# EAGLE board PROJECT-TSC_v115 (EAGLE 9.7.0)
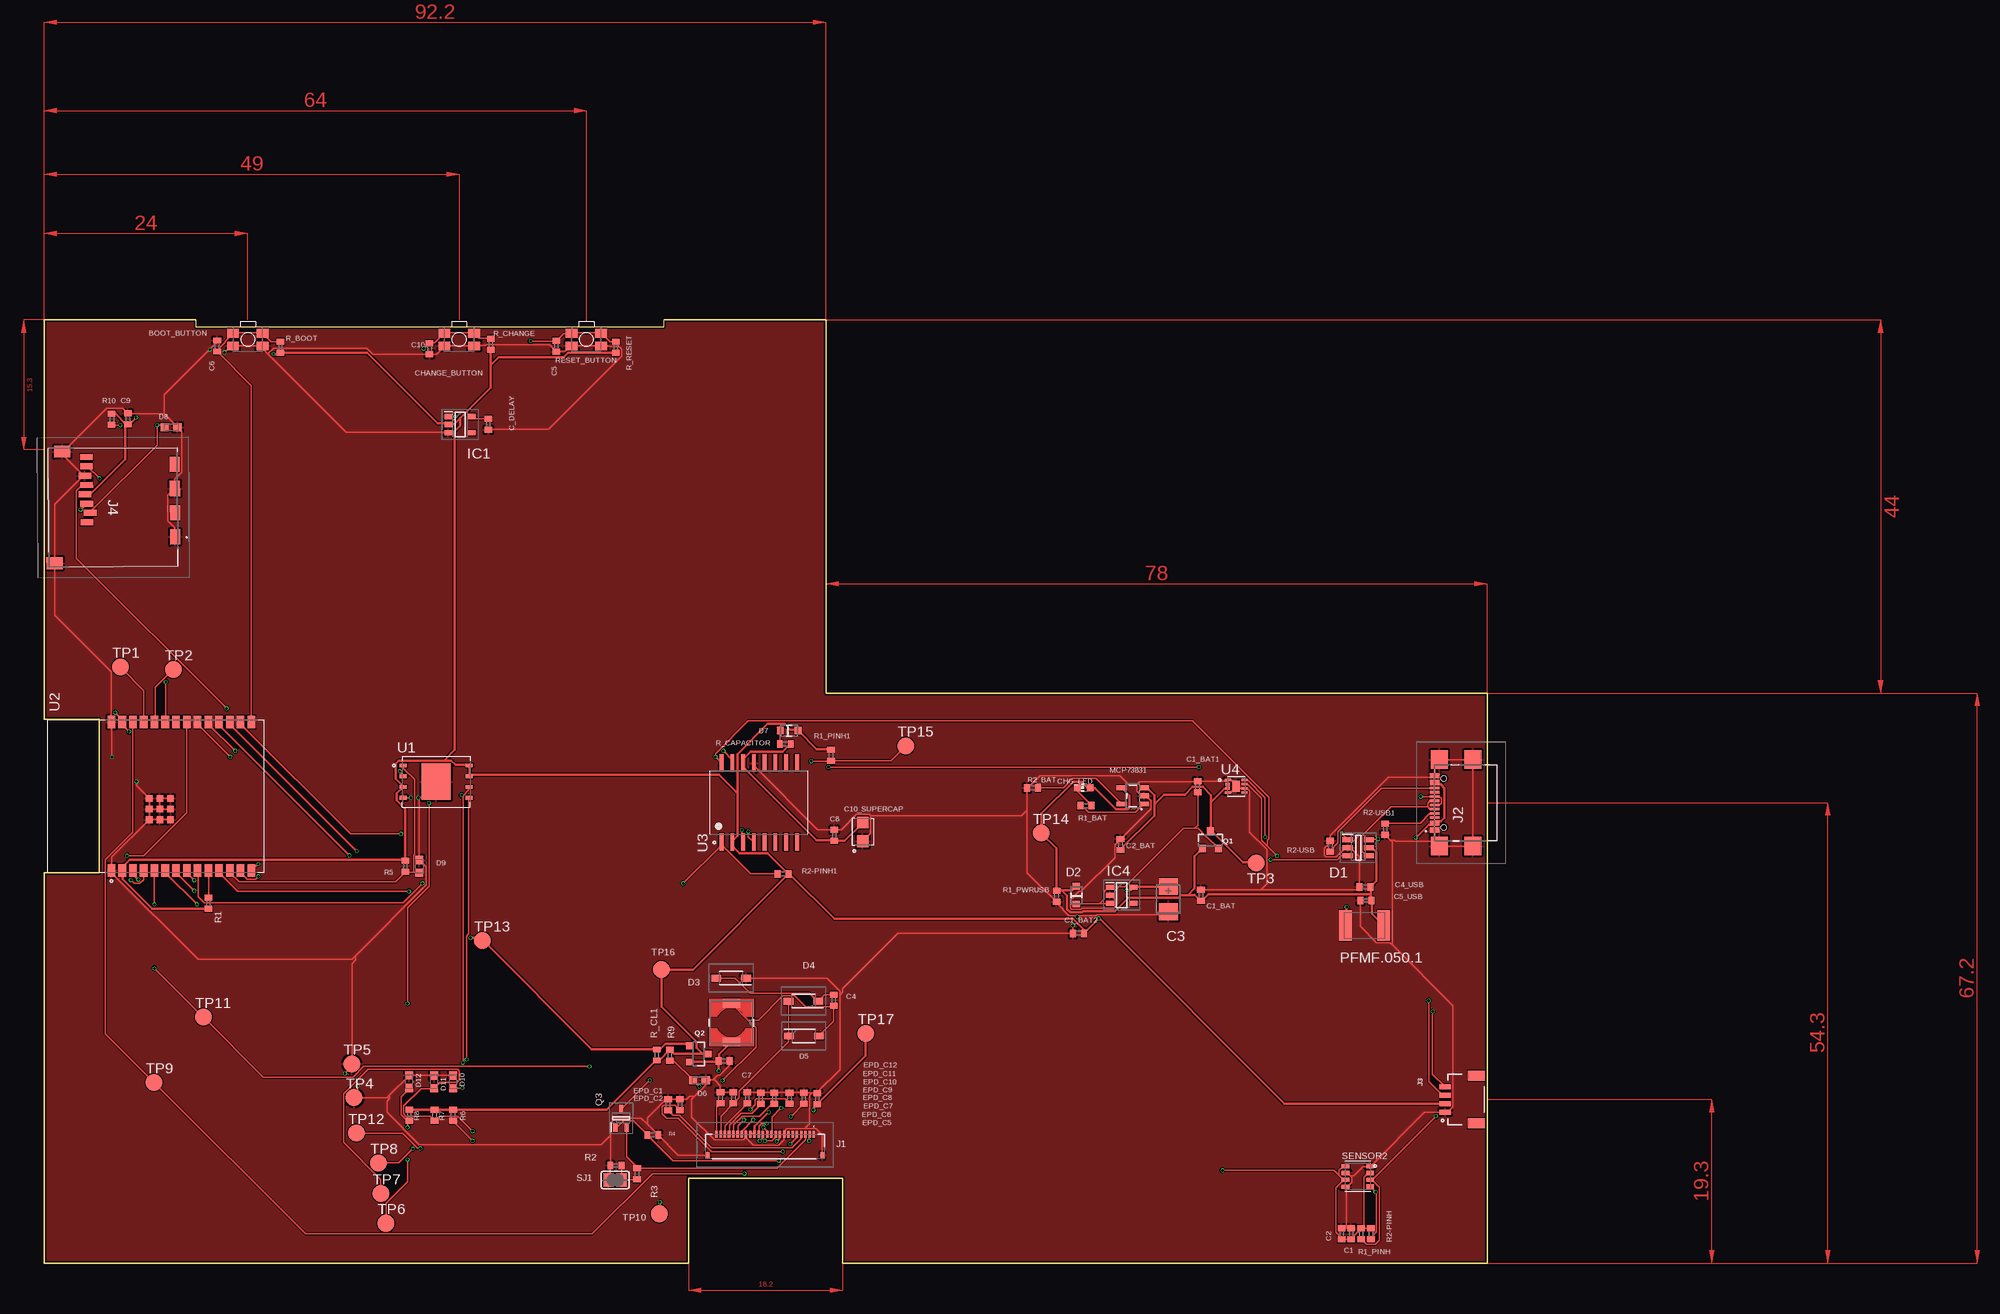
[diagram p0: board, top side]
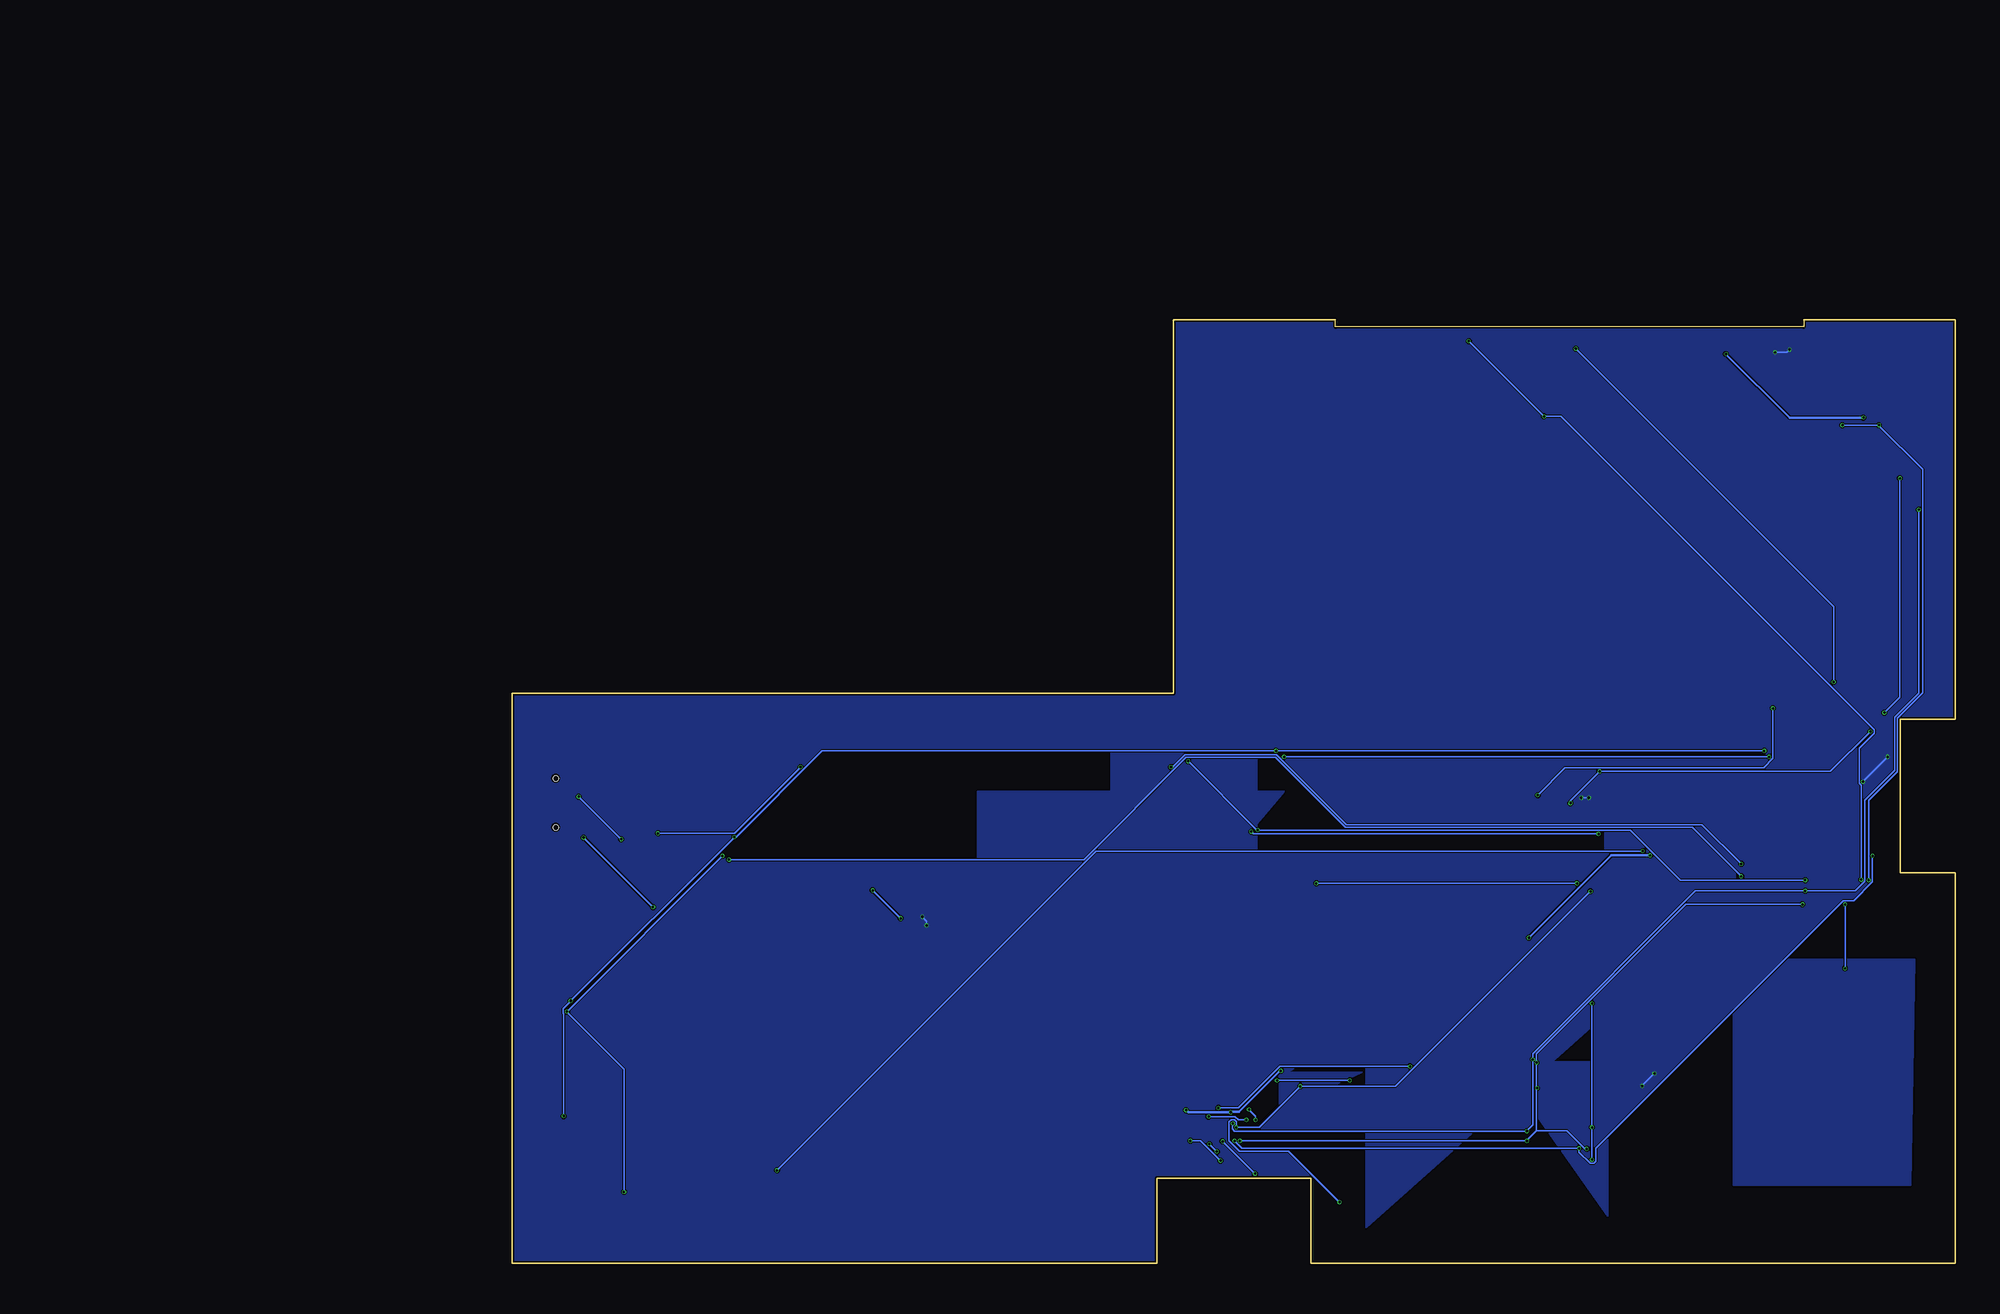
[diagram p1: board, bottom side, seen from below]

Size 170.2 x 111.2 mm. Coordinates in mm from the lower left corner, seen from the top.
Outline: 0,111.2 17.9,111.2 17.9,110.4 73.1,110.4 73.1,111.2 92.2,111.2 92.2,67.2 170.2,67.2 170.2,0 94.2,0 94.2,10 76,10 76,0 0,0 0,46 6.5,46 6.5,64.1 0,64.1 0,111.2
Copper layers (1*16): Top 0.035mm / dielectric 1.6mm / Bottom 0.035mm
Design rules "jlcpcb-2layers.dru": minimum track width 5mil, minimum drill 0.3mm, track to track 5mil, track to pad 5mil, pad to pad 5mil, via to via 5mil, smd to smd 5mil, copper to edge 0.2mm, drill to drill 6mil, minimum pad ring 10mil, minimum via ring 3mil, stop-mask expansion 4mil, vias tented up to drill 0mil, thermal gap 10mil
Net classes: 1 power: width 0.3 mm; 2 normal: width 0.15 mm

## Footprints (pad centres in the part's own frame; a part is rotated, then mirrored left to right if it is on the bottom)
MYBUTTON = smd 1.4 x 1.05: 1 1.75,0.75; 2 -1.75,0.75; 3 -1.75,-0.75; 4 1.75,-0.75
EAGLE-LTSPICE_C0402 = smd 0.7 x 0.9: 1 -0.65,0; 2 0.65,0
RCL_CT3528 = smd 2 x 2.2: + -1.5,0; - 1.5,0
CAPCP3225X100N = smd 1.4 x 1.4: 1 -1.1,0; 2 1.1,0
ADAFRUIT_CHIP-LED0603 = smd 0.8 x 0.8: A 0,-0.75; C 0,0.75
SOT95P280X145-6N = smd 1.2 x 0.6: 1 -1.25,0.95; 2 -1.25,0; 3 -1.25,-0.95; 4 1.25,-0.95; 5 1.25,0; 6 1.25,0.95
ESP32_WROVER_AVX---SD0805S020S1R0_AVX_SD0805S020S1R0_0 = smd 0.8 x 0.9: 1 -1.05,0; 2 1.05,0
SOD3716X135N = smd 1.15 x 0.8: 1 -1.75,0; 2 1.75,0
DIOC1608X36N = smd 0.97 x 0.94: 1 -0.75,0; 2 0.75,0
SOT95P280X120-5N = smd 0.9 x 0.6: 1 -1.4,0.95; 2 -1.4,0; 3 -1.4,-0.95; 4 1.4,-0.95; 5 1.4,0.95
FH34SRJ24S05SH99 = smd 0.3 x 0.8: 1 5.75,1.45; 2 5.25,1.45; 3 4.75,1.45; 4 4.25,1.45; 5 3.75,1.45; 6 3.25,1.45; 7 2.75,1.45; 8 2.25,1.45; 9 1.75,1.45; 10 1.25,1.45; 11 0.75,1.45; 12 0.25,1.45; 13 -0.25,1.45; 14 -0.75,1.45; 15 -1.25,1.45; 16 -1.75,1.45; 17 -2.25,1.45; 18 -2.75,1.45; 19 -3.25,1.45; 20 -3.75,1.45; 21 -4.25,1.45; 22 -4.75,1.45; 23 -5.25,1.45; 24 -5.75,1.45 | smd 0.4 x 0.8: MP1 6.75,-1.05; MP2 -6.75,-1.05
SAMACSYS_PARTS_USB4110GFA = smd 0.3 x 1.15: A1 -3.35,3.678; A4 -2.55,3.678; A5 -1.25,3.678; A6 -0.25,3.678; A7 0.25,3.678; A8 1.25,3.678; A9 2.55,3.678; A12 3.35,3.678; B1 3.05,3.678; B4 2.25,3.678; B5 1.75,3.678; B6 0.75,3.678; B7 -0.75,3.678; B8 -1.75,3.678; B9 -2.25,3.678; B12 -3.05,3.678 | smd 2.18 x 2: MP1 -5.11,-0.827; MP2 5.11,-0.827; MP3 -5.11,3.103; MP4 5.11,3.103 | hole 0.65: -2.89,2.603; 2.89,2.603
JST04_1MM_RA = smd 0.6 x 1.35: 1 -1.5,0; 2 -0.5,0; 3 0.5,0; 4 1.5,0 | smd 1.2 x 2: NC1 2.8,-3.675; NC2 -2.8,-3.675
112ATAARR03ATTEND = smd 1.8 x 1.2: G1 10.6,10.4; G2 4.9,10.4; S1 7.75,10.4; S2 2.05,10.4 | smd 1.4 x 1.9: G3 13.6,-3.85; G4 0.45,-2.85 | smd 0.7 x 1.5: P1 8.8,0; P2 7.7,0.4; P3 6.6,0; P4 5.5,-0.2; P5 4.4,0; P6 3.3,-0.2; P7 2.2,0; P8 1.1,0
IND_4828-WE-TPC_WRE = smd 1.016 x 2.032: 1 -2.286,0; 2 2.286,0
ESP32_WROVER_SPARKFUN-IC-POWER_SOT23-5 = smd 0.55 x 1.2: 1 -0.95,-1.3; 2 0,-1.3; 3 0.95,-1.3; 4 0.95,1.3; 5 -0.95,1.3
ESP32C6_VARISTOR_CT/CN1812 = smd 1.5 x 3.6: 1 -2.25,0; 2 2.25,0
ESP32_WROVER_SPARKFUN-DISCRETESEMI_SOT23-3 = smd 0.8 x 0.9: 1 -0.95,-1; 2 0.95,-1; 3 0,1.1
SOT65P210X110-3N = smd 1.05 x 0.5: 1 -1.05,0.65; 2 -1.05,-0.65; 3 1.05,0
ESP32_WROVER_EAGLE-LTSPICE_R0402 = smd 0.7 x 0.9: 1 -0.65,0; 2 0.65,0
ESP32_WROVER_BME680_PSON80P300X300X100-8N = smd 1.016 x 0.5: 1 1.458,1.2; 2 1.458,0.4; 3 1.458,-0.4; 4 1.458,-1.2; 5 -1.458,-1.22; 6 -1.458,-0.4; 7 -1.458,0.4; 8 -1.458,1.2
SJ = smd 1.168 x 1.6: 1 -0.762,0; 2 0.762,0
TP20R = smd 2 x 2: TP 0,0
SON127P600X800X80-9N = smd 0.94 x 0.44: 1 -3.895,1.905; 2 -3.895,0.635; 3 -3.895,-0.635; 4 -3.895,-1.905; 5 3.895,-1.905; 6 3.895,-0.635; 7 3.895,0.635; 8 3.895,1.905 | smd 3.4 x 4.3: 9 0,0
XCVR_ESP32-C6-WROOM-1-N8 = smd 1.5 x 0.9: 1 -8.75,5.26; 2 -8.75,3.99; 3 -8.75,2.72; 4 -8.75,1.45; 5 -8.75,0.18; 6 -8.75,-1.09; 7 -8.75,-2.36; 8 -8.75,-3.63; 9 -8.75,-4.9; 10 -8.75,-6.17; 11 -8.75,-7.44; 12 -8.75,-8.71; 13 -8.75,-9.98; 14 -8.75,-11.25; 15 8.75,-11.25; 16 8.75,-9.98; 17 8.75,-8.71; 18 8.75,-7.44; 19 8.75,-6.17; 20 8.75,-4.9; 21 8.75,-3.63; 22 8.75,-2.36; 23 8.75,-1.09; 24 8.75,0.18; 25 8.75,1.45; 26 8.75,2.72; 27 8.75,3.99; 28 8.75,5.26 | smd 0.8 x 0.8: 29_1 -2.755,0.79; 29_2 -1.505,0.79; 29_3 -0.255,0.79; 29_4 -2.755,-0.46; 29_5 -1.505,-0.46; 29_6 -0.255,-0.46; 29_7 -2.755,-1.71; 29_8 -1.505,-1.71; 29_9 -0.255,-1.71
SOIC127P1032X265-16N = smd 2.05 x 0.59: 1 -4.655,4.445; 2 -4.655,3.175; 3 -4.655,1.905; 4 -4.655,0.635; 5 -4.655,-0.635; 6 -4.655,-1.905; 7 -4.655,-3.175; 8 -4.655,-4.445; 9 4.655,-4.445; 10 4.655,-3.175; 11 4.655,-1.905; 12 4.655,-0.635; 13 4.655,0.635; 14 4.655,1.905; 15 4.655,3.175; 16 4.655,4.445
SON50P200X200X80-9N = smd 0.76 x 0.27: 1 -0.985,0.75; 4 -0.985,-0.75; 5 0.985,-0.75; 6 0.985,-0.25; 7 0.985,0.25; 8 0.985,0.75 | smd 0.61 x 0.305: 2 -0.985,0.25; 3 -0.985,-0.25 | smd 0.9 x 1.3: 9 0,0

## Placement (x,y rotation side)
BOOT_BUTTON  BUTTON_CUSYOMV1  [MYBUTTON]  24.03,108.89 180 top
C1  100nF  [EAGLE-LTSPICE_C0402]  154.16,3.43 90 top
C1_BAT  4.7uF  [EAGLE-LTSPICE_C0402]  136.45,43.35 90 top
C1_BAT1  4.7uF  [EAGLE-LTSPICE_C0402]  136.05,56.14 90 top
C1_BAT2  4.7uF  [EAGLE-LTSPICE_C0402]  121.99,38.87 180 top
C2  100nF  [EAGLE-LTSPICE_C0402]  153.04,3.43 90 top
C2_BAT  4.7uF  [EAGLE-LTSPICE_C0402]  126.96,49.35 90 top
C3  100uF TANT  [RCL_CT3528]  132.61,42.9 270 top
C4  4.7uF/25V  [EAGLE-LTSPICE_C0402]  93.15,30.99 270 top
C4_USB  100nF  [EAGLE-LTSPICE_C0402]  155.8,44.35 180 top
C5  1uF  [EAGLE-LTSPICE_C0402]  60.42,108.11 270 top
C5_USB  4.7uF  [EAGLE-LTSPICE_C0402]  155.88,42.75 180 top
C6  100nF  [EAGLE-LTSPICE_C0402]  20.42,108.13 90 top
C7  10uF  [EAGLE-LTSPICE_C0402]  80.22,23.81 0 top
C8  100nF  [EAGLE-LTSPICE_C0402]  93.2,50.43 91.1 top
C9  100nF  [EAGLE-LTSPICE_C0402]  9.88,99.53 90 top
C10  100nF  [EAGLE-LTSPICE_C0402]  45.46,107.83 270 top
C10_SUPERCAP  CPH3225A  [CAPCP3225X100N]  96.56,50.84 90 top
C_DELAY  100nF  [EAGLE-LTSPICE_C0402]  52.41,98.89 270 top
CHANGE_BUTTON  BUTTON_CUSYOMV1  [MYBUTTON]  48.96,108.89 180 top
CHG_LED  [ADAFRUIT_CHIP-LED0603]  122.64,56.05 90 top
D1  USBLC6-2SC6Y  [SOT95P280X145-6N]  155,48.97 0 top
D2  ESP32_WROVER_AVX---SD0805S020S1R0_AVX_SD0805S020S1R0_0_0AVX_SD0805S020S1R0_0_0  [ESP32_WROVER_AVX---SD0805S020S1R0_AVX_SD0805S020S1R0_0]  121.74,43.38 90 top
D3  MBR0530  [SOD3716X135N]  81.03,33.59 180 top
D4  MBR0530  [SOD3716X135N]  89.57,30.88 180 top
D5  MBR0530  [SOD3716X135N]  89.61,26.78 0 top
D6  PGB1010603MR  [DIOC1608X36N]  77.3,21.57 0 top
D7  ESP32_WROVER_AVX---SD0805S020S1R0_AVX_SD0805S020S1R0_0_0AVX_SD0805S020S1R0_0_0  [ESP32_WROVER_AVX---SD0805S020S1R0_AVX_SD0805S020S1R0_0]  87.89,62.78 0 top
D8  PGB1010603MR  [DIOC1608X36N]  14.98,98.57 0 top
D9  PGB1010603MR  [DIOC1608X36N]  44.26,46.77 90 top
D10  PGB1010603MR  [DIOC1608X36N]  48.24,21.37 90 top
D11  PGB1010603MR  [DIOC1608X36N]  46.02,21.37 90 top
D12  PGB1010603MR  [DIOC1608X36N]  43.07,21.38 90 top
EPD_C1  1uF/50V  [EAGLE-LTSPICE_C0402]  73.59,18.65 90 top
EPD_C2  1uF/50V  [EAGLE-LTSPICE_C0402]  75,18.65 90 top
EPD_C5  0.1uF/50V  [EAGLE-LTSPICE_C0402]  91.19,19.39 90 top
EPD_C6  1uF/50V  [EAGLE-LTSPICE_C0402]  89.61,19.45 90 top
EPD_C7  1uF/50V  [EAGLE-LTSPICE_C0402]  87.92,19.45 90 top
EPD_C8  1uF/50V  [EAGLE-LTSPICE_C0402]  86.13,19.45 90 top
EPD_C9  1uF/50V  [EAGLE-LTSPICE_C0402]  84.54,19.45 90 top
EPD_C10  1uF/50V  [EAGLE-LTSPICE_C0402]  82.95,19.49 90 top
EPD_C11  1uF/50V  [EAGLE-LTSPICE_C0402]  81.31,19.47 90 top
EPD_C12  1uF/50V  [EAGLE-LTSPICE_C0402]  79.79,19.49 90 top
IC1  BD5229G-TR  [SOT95P280X120-5N]  49.07,98.87 0 top
IC4  XC6220A331MR-G  [SOT95P280X120-5N]  127.11,43.37 0 top
J1  FH34SRJ-24S-0.5SH_99_  [FH34SRJ24S05SH99]  85.04,13.74 0 top
J2  SAMACSYS_PARTS_USB4110-GF-A  [SAMACSYS_PARTS_USB4110GFA]  167.68,54.26 90 top
J3  QWIIC_RIGHT_ANGLE  [JST04_1MM_RA]  165.25,19.28 90 top
J4  112A-TAAR-R03_ATTEND  [112ATAARR03ATTEND]  4.99,96.15 270.4 top
L1  68uH  [IND_4828-WE-TPC_WRE]  81.07,28.35 270 top
MCP73831  ESP32_WROVER_SPARKFUN-IC-POWER_MCP73831  [ESP32_WROVER_SPARKFUN-IC-POWER_SOT23-5]  128.41,55.09 90 top
PFMF.050.1  ESP32C6_VARISTORCN1812  [ESP32C6_VARISTOR_CT/CN1812]  155.74,39.8 0 top
Q1  20V/4.2A/52mΩ/1.4W  [ESP32_WROVER_SPARKFUN-DISCRETESEMI_SOT23-3]  137.56,49.86 0 top
Q2  20V/4.2A/52mΩ/1.4W  [ESP32_WROVER_SPARKFUN-DISCRETESEMI_SOT23-3]  77.18,24.66 270 top
Q3  SI1308EDL-T1-GE3  [SOT65P210X110-3N]  68.04,17.08 90 top
R1  10K  [ESP32_WROVER_EAGLE-LTSPICE_R0402]  19.38,42.41 90 top
R1_BAT  200  [ESP32_WROVER_EAGLE-LTSPICE_R0402]  122.88,53.93 0 top
R1_PINH  10K  [ESP32_WROVER_EAGLE-LTSPICE_R0402]  155.33,3.47 90 top
R1_PINH1  10K  [ESP32_WROVER_EAGLE-LTSPICE_R0402]  92.81,59.89 90 top
R1_PWRUSB  100K  [ESP32_WROVER_EAGLE-LTSPICE_R0402]  119.42,43.24 90 top
R2  2.2  [ESP32_WROVER_EAGLE-LTSPICE_R0402]  67.44,11.51 0 top
R2-PINH  10K  [ESP32_WROVER_EAGLE-LTSPICE_R0402]  156.49,3.47 90 top
R2-PINH1  10K  [ESP32_WROVER_EAGLE-LTSPICE_R0402]  87.17,45.89 0 top
R2-USB  5k1  [ESP32_WROVER_EAGLE-LTSPICE_R0402]  151.7,49.13 90 top
R2-USB1  5K1  [ESP32_WROVER_EAGLE-LTSPICE_R0402]  158.17,51.17 90 top
R2_BAT  2K  [ESP32_WROVER_EAGLE-LTSPICE_R0402]  116.59,56.03 0 top
R3  0.47  [ESP32_WROVER_EAGLE-LTSPICE_R0402]  69.94,10.51 270 top
R4  10K  [ESP32_WROVER_EAGLE-LTSPICE_R0402]  71.8,15.11 0 top
R5  10K  [ESP32_WROVER_EAGLE-LTSPICE_R0402]  42.62,46.81 90 top
R6  10K  [ESP32_WROVER_EAGLE-LTSPICE_R0402]  48.24,17.41 90 top
R7  10K  [ESP32_WROVER_EAGLE-LTSPICE_R0402]  46.06,17.41 90 top
R8  10K  [ESP32_WROVER_EAGLE-LTSPICE_R0402]  43.08,17.41 90 top
R9  10K  [ESP32_WROVER_EAGLE-LTSPICE_R0402]  73.8,24.51 90 top
R10  10K  [ESP32_WROVER_EAGLE-LTSPICE_R0402]  7.96,99.51 90 top
R_BOOT  10K  [ESP32_WROVER_EAGLE-LTSPICE_R0402]  27.88,107.97 90 top
R_CAPACITOR  15  [ESP32_WROVER_EAGLE-LTSPICE_R0402]  87.42,61.18 0 top
R_CHANGE  10K  [ESP32_WROVER_EAGLE-LTSPICE_R0402]  52.69,108.34 90 top
R_CL1  10K  [ESP32_WROVER_EAGLE-LTSPICE_R0402]  72.28,24.53 90 top
R_RESET  10K  [ESP32_WROVER_EAGLE-LTSPICE_R0402]  67.43,107.99 90 top
RESET_BUTTON  BUTTON_CUSYOMV1  [MYBUTTON]  63.95,108.89 180 top
SENSOR2  ESP32_WROVER_BME680_BME680  [ESP32_WROVER_BME680_PSON80P300X300X100-8N]  154.94,10.22 0 top
SJ1  [SJ]  67.36,9.79 0 top
TP1  TPTP20R  [TP20R]  9.01,70.29 0 top
TP2  TPTP20R  [TP20R]  15.23,69.99 0 top
TP3  TPTP20R  [TP20R]  142.95,47.19 0 top
TP4  TPTP20R  [TP20R]  36.57,19.49 0 top
TP5  TPTP20R  [TP20R]  36.29,23.49 0 top
TP6  TPTP20R  [TP20R]  40.31,4.69 0 top
TP7  TPTP20R  [TP20R]  39.73,8.19 0 top
TP8  TPTP20R  [TP20R]  39.45,11.79 0 top
TP9  TPTP20R  [TP20R]  12.97,21.29 0 top
TP10  TPTP20R  [TP20R]  72.59,5.81 0 top
TP11  TPTP20R  [TP20R]  18.79,28.99 0 top
TP12  TPTP20R  [TP20R]  36.84,15.31 0 top
TP13  TPTP20R  [TP20R]  51.69,38.01 0 top
TP14  TPTP20R  [TP20R]  117.59,50.69 0 top
TP15  TPTP20R  [TP20R]  101.64,60.99 0 top
TP16  TPTP20R  [TP20R]  72.79,34.59 0 top
TP17  TPTP20R  [TP20R]  96.94,27.09 0 top
U1  W25Q512JVEIQ  [SON127P600X800X80-9N]  46.24,56.76 0 top
U2  ESP32-C6-WROOM-1-N8  [XCVR_ESP32-C6-WROOM-1-N8]  13.2,55.04 90 top
U3  DS3231SN#  [SOIC127P1032X265-16N]  84.35,54.3 90 top
U4  MAX17048G+T10  [SON50P200X200X80-9N]  140.6,56.22 0 top

## Library data of the parts
BOOT_BUTTON CHANGE_BUTTON CHG_LED PFMF.050.1 RESET_BUTTON SJ1 TP1-TP17 = DeskAssistant v19 v1
C1 C1_BAT C1_BAT1 C1_BAT2 C2 C2_BAT C4 C4_USB C5 C5_USB C6-C10 C_DELAY EPD_C1 EPD_C2 EPD_C5-EPD_C12 = DeskAssistant v19 v1; SPICEMODEL: NONE; SPICEPREFIX: C
C3 = DeskAssistant v19 v1; SPICEPREFIX: C
C10_SUPERCAP = DeskAssistant v19 v1; AVAILABILITY: Not in stock; CHECK_PRICES: https://www.snapeda.com/parts/CPH3225A/Seiko+Instruments/view-part/?ref=eda; DESCRIPTION: 11 mF (EDLC) Supercapacitor 3.3 V 1210 (3225 Metric) - -; MF: Seiko Instruments; MP: CPH3225A; PACKAGE: 1210 Seiko; PRICE: None; PURCHASE-URL: https://www.snapeda.com/api/url_track_click_mouser/?unipart_id=562593&manufacturer=Seiko Instruments&part_name=CPH3225A&search_term=None; SNAPEDA_LINK: https://www.snapeda.com/parts/CPH3225A/Seiko+Instruments/view-part/?ref=snap
D1 = DeskAssistant v19 v1; AVAILABILITY: In Stock; CHECK_PRICES: https://www.snapeda.com/parts/USBLC6-2SC6Y/STMicroelectronics/view-part/?ref=eda; DESCRIPTION: 17V Clamp 5A (8/20µs) Ipp Tvs Diode Surface Mount SOT-23-6; MF: STMicroelectronics; MP: USBLC6-2SC6Y; PACKAGE: SOT-23-6 STMicroelectronics; PRICE: None; SNAPEDA_LINK: https://www.snapeda.com/parts/USBLC6-2SC6Y/STMicroelectronics/view-part/?ref=snap
D2 D7 = DeskAssistant v19 v1; CENTROID_NOT_SPECIFIED: No; DATASHEET: http://datasheets.avx.com/schottky.pdf; DIGIKEY_DESCRIPTION: DIODE SCHOTTKY 20V 1A 0805; DIGIKEY_PART_NUMBER: 478-7800-1-ND; LEAD_FREE: yes; MF: AVX; MOUSER_PART_NUMBER: 581-SD0805S020S1R0; PACKAGE: 0805 (2012 metric); PREFIX: D; ROHS: yes; TEMPERATURE_RANGE_HIGH: +125°C; TEMPERATURE_RANGE_LOW: -55°C
D3-D5 = DeskAssistant v19 v1; AVAILABILITY: In Stock; CHECK_PRICES: https://www.snapeda.com/parts/MBR0530/Onsemi/view-part/?ref=eda; DESCRIPTION: Diode Schottky 30 V 500mA Surface Mount SOD-123; MF: ON Semiconductor; MP: MBR0530; PACKAGE: SOD-123-2 ON Semiconductor; PRICE: None; PURCHASE-URL: https://www.snapeda.com/api/url_track_click_mouser/?unipart_id=179458&manufacturer=ON Semiconductor&part_name=MBR0530&search_term=None; SNAPEDA_LINK: https://www.snapeda.com/parts/MBR0530/Onsemi/view-part/?ref=snap
D6 D8-D12 = DeskAssistant v19 v1; AVAILABILITY: In Stock; CHECK_PRICES: https://www.snapeda.com/parts/PGB1010603MR/Littelfuse/view-part/?ref=eda; DESCRIPTION: 150V (Typ) Clamp - Ipp Tvs Diode Surface Mount 0603 (1608 Metric); MF: Littelfuse Inc.; MP: PGB1010603MR; PACKAGE: 0603 Littelfuse Inc.; PRICE: None; PURCHASE-URL: https://www.snapeda.com/api/url_track_click_mouser/?unipart_id=5659453&manufacturer=Littelfuse Inc.&part_name=PGB1010603MR&search_term=None; SNAPEDA_LINK: https://www.snapeda.com/parts/PGB1010603MR/Littelfuse/view-part/?ref=snap
IC1 = DeskAssistant v19 v1; DESCRIPTION: Voltage Detector with Adjustable Delay Time: CMOS processes are utilized to develop high precision, low current consumption CMOS reset ICs that allow arbitrary setting of the delay time. The extensive lineup includes both Nch Open Drain and CMOS output types in a wide range of detection voltages (from 2.3V to 6.0V, in 0.1V steps), enabling selection of the ideal solution based on customer requirements. In addition, the entire series is of course both lead-free and RoHS-compliant.; HEIGHT: 1.25mm; MANUFACTURER_NAME: ROHM Semiconductor; MANUFACTURER_PART_NUMBER: BD5229G-TR; MOUSER_PART_NUMBER: 755-BD5229G-TR; MOUSER_PRICE-STOCK: https://www.mouser.co.uk/ProductDetail/ROHM-Semiconductor/BD5229G-TR?qs=4kLU8WoGk0vvnhrrYwdszw%3D%3D
IC4 = DeskAssistant v19 v1; DESCRIPTION: LDO Voltage Regulators; HEIGHT: 1.2mm; MANUFACTURER_NAME: Torex; MANUFACTURER_PART_NUMBER: XC6220A331MR-G; MOUSER_PART_NUMBER: 865-XC6220A331MR-G; MOUSER_PRICE-STOCK: https://www.mouser.co.uk/ProductDetail/Torex-Semiconductor/XC6220A331MR-G?qs=AsjdqWjXhJ8ZSWznL1J0gg%3D%3D
J1 = DeskAssistant v19 v1; DESCRIPTION: 24 Position FFC, FPC Connector Contacts, Top and Bottom 0.020" (0.50mm) Surface Mount, Right Angle; HEIGHT: 1.1mm; MANUFACTURER_NAME: Hirose; MANUFACTURER_PART_NUMBER: FH34SRJ-24S-0.5SH(99); MOUSER_PART_NUMBER: 798-FH34SRJ24S05SH99; MOUSER_PRICE-STOCK: https://www.mouser.co.uk/ProductDetail/Hirose-Connector/FH34SRJ-24S-0.5SH99?qs=vcbW%252B4%252BSTIpKBl5ap9J8Fw%3D%3D
J2 = DeskAssistant v19 v1; DESCRIPTION: CONN USB 2.0 TYPE-C R/A SMT; HEIGHT: 3.26mm; MANUFACTURER_NAME: GCT (GLOBAL CONNECTOR TECHNOLOGY); MANUFACTURER_PART_NUMBER: USB4110-GF-A; MOUSER_PART_NUMBER: 640-USB4110-GF-A; MOUSER_PRICE-STOCK: https://www.mouser.co.uk/ProductDetail/GCT/USB4110-GF-A?qs=KUoIvG%2F9IlYiZvIXQjyJeA%3D%3D
J3 = DeskAssistant v19 v1; PROD_ID: CONN-13694
J4 = DeskAssistant v19 v1; DESCRIPTION: Micro SD Card Socket, Push-Push Type, Top Mount, SMT, H=1.83mm, 10u; HEIGHT: 1.9mm; MANUFACTURER_NAME: ATTEND; MANUFACTURER_PART_NUMBER: 112A-TAAR-R03 ATTEND
L1 = DeskAssistant v19 v1; COPYRIGHT: Copyright (C) 2024 Ultra Librarian. All rights reserved.; MANUFACTURER_PART_NUMBER: 744043680; MFR_NAME: Wurth Electronics
MCP73831 = DeskAssistant v19 v1; PROD_ID: IC-09995
Q1 Q2 = DeskAssistant v19 v1; PROD_ID: TRAN-14388
Q3 = DeskAssistant v19 v1; AVAILABILITY: In Stock; CHECK_PRICES: https://www.snapeda.com/parts/SI1308EDL-T1-GE3/Vishay+Siliconix/view-part/?ref=eda; DESCRIPTION: Si1308EDL-T1-GE3 N-channel MOSFET Transistor, 1.5 A, 30 V, 3-Pin SC-70 | Siliconix / Vishay SI1308EDL-T1-GE3; MF: Vishay Siliconix; MP: SI1308EDL-T1-GE3; PACKAGE: SOT-323 Vishay Semiconductor; PRICE: None; PURCHASE-URL: https://www.snapeda.com/api/url_track_click_mouser/?unipart_id=274603&manufacturer=Vishay Siliconix&part_name=SI1308EDL-T1-GE3&search_term=None; SNAPEDA_LINK: https://www.snapeda.com/parts/SI1308EDL-T1-GE3/Vishay+Siliconix/view-part/?ref=snap
R1 R1_BAT R1_PINH R1_PINH1 R1_PWRUSB R2 R2-PINH R2-PINH1 R2-USB R2-USB1 R2_BAT R3-R10 R_BOOT R_CAPACITOR R_CHANGE R_CL1 R_RESET = DeskAssistant v19 v1; SPICEMODEL: NONE; SPICEPREFIX: R
SENSOR2 = DeskAssistant v19 v1; AVAILABILITY: Unavailable; DESCRIPTION: Integrated Environmental Unit; MF: Bosch Sensortec; MP: BME680; PACKAGE: LGA-8 Bosch Tools; PRICE: None
U1 = DeskAssistant v19 v1; AVAILABILITY: In Stock; CHECK_PRICES: https://www.snapeda.com/parts/W25Q512JVEIQ/Winbond+Electronics/view-part/?ref=eda; DESCRIPTION: FLASH - NOR Memory IC 512Mb (64M x 8) SPI - Quad I/O 133 MHz 8-WSON (8x6); MF: Winbond Electronics; MP: W25Q512JVEIQ; PACKAGE: Package; PRICE: None; SNAPEDA_LINK: https://www.snapeda.com/parts/W25Q512JVEIQ/Winbond+Electronics/view-part/?ref=snap
U2 = DeskAssistant v19 v1; AVAILABILITY: In Stock; CHECK_PRICES: https://www.snapeda.com/parts/ESP32-C6-WROOM-1-N8/Espressif+Systems/view-part/?ref=eda; DESCRIPTION: Multiprotocol Modules ESP32-C6 module, Wi-Fi 6 in 2.4 GHz band, Bluetooth 5, Zigbee 3.0 and Thread. ESP34-WROOM Compatible - ENGINEERING SAMPLE; MF: Espressif Systems; MP: ESP32-C6-WROOM-1-N8; PACKAGE: None; PRICE: None; SNAPEDA_LINK: https://www.snapeda.com/parts/ESP32-C6-WROOM-1-N8/Espressif+Systems/view-part/?ref=snap
U3 = DeskAssistant v19 v1; AVAILABILITY: In Stock; CHECK_PRICES: https://www.snapeda.com/parts/DS3231SN%23/Analog+Devices/view-part/?ref=eda; DESCRIPTION: Extremely Accurate I²C-Integrated RTC/TCXO/Crystal; MF: Analog Devices; MP: DS3231SN#; PACKAGE: SOIC-16 Maxim; PRICE: None; PURCHASE-URL: https://www.snapeda.com/api/url_track_click_mouser/?unipart_id=99048&manufacturer=Analog Devices&part_name=DS3231SN#&search_term=None; SNAPEDA_LINK: https://www.snapeda.com/parts/DS3231SN%23/Analog+Devices/view-part/?ref=snap
U4 = DeskAssistant v19 v1; AVAILABILITY: In Stock; CHECK_PRICES: https://www.snapeda.com/parts/MAX17048G+T10/Analog+Devices/view-part/?ref=eda; DESCRIPTION: 3µA 1-Cell/2-Cell Fuel Gauge with ModelGauge; MF: Analog Devices; MP: MAX17048G+T10; PACKAGE: TDFN-8 Maxim; PRICE: None; PURCHASE-URL: https://www.snapeda.com/api/url_track_click_mouser/?unipart_id=329239&manufacturer=Analog Devices&part_name=MAX17048G+T10&search_term=None; SNAPEDA_LINK: https://www.snapeda.com/parts/MAX17048G+T10/Analog+Devices/view-part/?ref=snap

## Nets
3V3 [power]: C1_BAT2.1 C3.+ C9.1 D7.2 IC1.2 IC4.5 J3.2 J4.P4 Q2.3 R1.1 R1_PINH1.2 R2-PINH1.2 R5.2 R6.2 R7.2 R8.2 R9.2 R10.2 R_BOOT.1 R_CHANGE.1 R_CL1.1 R_RESET.1 TP16.TP U1.3 U1.7 U1.8 U2.2 U3.2
32KHZ [normal]: R2-PINH1.1 U2.9 U3.1
DN [normal]: D1.4 J2.A7 J2.B7
DP [normal]: D1.6 J2.A6 J2.B6
EPD_3V3 [power]: C7.1 EPD_C5.1 J1.15 J1.16 L1.2 Q2.2 TP17.TP
EPD_3V3_C [power]: Q2.1 R_CL1.2 TP13.TP U2.18
EPD_BUSY [normal]: J1.9 TP9.TP U2.26
EPD_CS [normal]: D6.1 J1.12 R9.1 TP10.TP U2.11
EPD_DC [normal]: J1.11 TP11.TP U2.5
EPD_RST [normal]: J1.10 TP12.TP U2.21
FLASH_CS [normal]: D9.1 R5.1 U1.1 U2.12
GDR [normal]: J1.2 Q3.1 R4.1
GND [normal]: BOOT_BUTTON.1 BOOT_BUTTON.2 C1.2 C1_BAT1.2 C1_BAT2.2 C1_BAT.2 C2.2 C2_BAT.2 C3.- C4_USB.2 C5.2 C5_USB.2 C6.2 C7.2 C8.2 C9.2 C10.2 C10_SUPERCAP.1 C_DELAY.2 CHANGE_BUTTON.1 CHANGE_BUTTON.2 D1.2 D3.1 D6.2 D8.2 D9.2 D10.2 D11.2 D12.2 EPD_C1.2 EPD_C2.2 EPD_C5.2 EPD_C6.2 EPD_C7.2 EPD_C8.2 EPD_C9.2 EPD_C10.2 EPD_C11.2 EPD_C12.2 IC1.3 IC4.2 J1.8 J1.17 J1.MP1 J1.MP2 J2.A1 J2.A12 J2.B1 J2.B12 J2.MP1 J2.MP2 J2.MP3 J2.MP4 J3.1 J4.G1 J4.G2 J4.G3 J4.G4 J4.P6 MCP73831.2 R1_PWRUSB.1 R2-USB1.1 R2-USB.2 R2.1 R2_BAT.1 R4.2 RESET_BUTTON.1 RESET_BUTTON.2 SENSOR2.1 SENSOR2.5 SENSOR2.7 SJ1.1 TP4.TP TP5.TP U1.4 U1.9 U2.1 U2.28 U2.29_1 U2.29_2 U2.29_3 U2.29_4 U2.29_5 U2.29_6 U2.29_7 U2.29_8 U2.29_9 U3.13 U4.1 U4.4 U4.6 U4.9
GPIO8 [normal]: R1.2 U2.10
I2C_PW [normal]: C1.1 C2.1 R1_PINH.2 R2-PINH.2 SENSOR2.2 SENSOR2.6 SENSOR2.8 U2.17
INT_RTC [normal]: R1_PINH1.1 TP15.TP U2.8 U3.3
IO/BOOT [normal]: BOOT_BUTTON.3 BOOT_BUTTON.4 C6.1 R_BOOT.2 U2.15
IO/CHANGE [normal]: C10.1 CHANGE_BUTTON.3 CHANGE_BUTTON.4 R_CHANGE.2 U2.23
MISO [normal]: D12.1 J4.P7 R8.1 TP6.TP U1.2 U2.27
MOSI [normal]: D11.1 J1.14 J4.P3 R7.1 TP7.TP U1.5 U2.7
N$1 [normal]: J2.A5 R2-USB1.2
N$2 [normal]: J2.B5 R2-USB.1
N$4 [normal]: C1_BAT1.1 D2.1 IC4.1 IC4.3 Q1.2
N$5 [normal]: C4.1 D3.2 D4.1
N$6 [normal]: C_DELAY.1 IC1.5
N$7 [normal]: CHG_LED.C R1_BAT.2
N$9 [normal]: MCP73831.1 R1_BAT.1
N$10 [normal]: EPD_C1.1 J1.4
N$11 [normal]: MCP73831.5 R2_BAT.2
N$12 [normal]: EPD_C2.1 J1.5
N$13 [normal]: D7.1 R_CAPACITOR.1
N$14 [normal]: EPD_C8.1 J1.20
N$15 [normal]: EPD_C7.1 J1.19
N$16 [normal]: EPD_C6.1 J1.18
N$18 [normal]: EPD_C10.1 J1.22
N$20 [normal]: EPD_C12.1 J1.24
PREVGH [normal]: EPD_C9.1 J1.21
PREVGL [normal]: D4.2 D5.1 EPD_C11.1 J1.23
RESE [normal]: J1.3 Q3.2 R3.1
RESE' [normal]: R2.2 R3.2 SJ1.2
RESET [normal]: C5.1 IC1.1 R_RESET.2 RESET_BUTTON.3 RESET_BUTTON.4 U2.3
RTC_RST [normal]: U2.16 U3.4
RX [normal]: TP2.TP U2.24
SCK [normal]: D10.1 J1.13 J4.P5 R6.1 TP8.TP U1.6 U2.6
SCL [normal]: J3.4 R2-PINH.1 SENSOR2.4 U2.20 U3.16 U4.7
SDA [normal]: J3.3 R1_PINH.1 SENSOR2.3 U2.19 U3.15 U4.8
SRC [normal]: C4.2 D5.2 L1.1 Q3.3
SS_SD [normal]: D8.1 J4.P2 R10.1 U2.4
TX [normal]: TP1.TP U2.25
USB_D+ [normal]: D1.1 U2.14
USB_D- [normal]: D1.3 U2.13
VBAT [power]: C2_BAT.1 MCP73831.3 Q1.3 TP3.TP U4.2 U4.3
VBUS [power]: C1_BAT.1 C4_USB.1 C5_USB.1 CHG_LED.A D1.5 D2.2 MCP73831.4 PFMF.050.1.2 Q1.1 R1_PWRUSB.2 TP14.TP
VRTC [power]: C8.1 C10_SUPERCAP.2 R_CAPACITOR.2 U3.14
VUSB [power]: J2.A4 J2.A9 J2.B4 J2.B9 PFMF.050.1.1

## Tracks (layer width: path | path; a pad name or v marks a point on that pad's centre or on a via)
3V3  (via drill 0.3)
  Top 0.3: C9.1 9.84,98.93 9.65,98.93 8.45,100.14 8,100.14 R10.2 | J4.P4 4.83,90.68 5.46,90.68 9.59,94.81 9.59,98.81 C9.1 | 49.08,99.62 52.64,103.19 52.64,105.85 | 49.08,99.62 48.39,98.93 47.69,98.93 IC1.2 47.56,99 46.42,99 38.1,107.31 27.94,107.31 R_BOOT.1 27.81,107.19 v27.05,107.19 | 52.64,105.85 52.64,107.63 R_CHANGE.1 | R_RESET.1 67.37,107.31 61.78,107.31 61.28,106.81 53.6,106.81 52.64,105.85 | v10.86,99.69 10.03,98.87 C9.1 | v127.7,43.94 128.14,43.94 128.46,44.26 IC4.5 128.65,44.39 132.59,44.39 C3.+ | J3.2 165.23,18.8 146.3,18.8 124.52,40.58 v124.4,40.64 122.68,38.92 C1_BAT2.1 122.75,39.18 121.35,40.58 93.22,40.58 87.95,45.85 R2-PINH1.2 | R1.1 19.37,41.78 12.76,41.78 9.27,45.28 9.27,46.23 U2.2 9.27,46.42 9.27,46.74 10.1,47.56 42.48,47.56 R5.2 42.61,47.5 42.61,53.53 41.59,54.55 41.59,55.37 42.29,56.07 U1.3 42.29,56.26 41.47,57.09 41.47,58.86 41.85,59.24 47.2,59.24 | 47.2,59.24 48.01,59.24 48.51,58.74 50.04,58.74 U1.8 50.16,58.61 50.16,57.4 U1.7 50.29,57.59 79.6,57.59 81.59,55.6 81.79,55.6 | R1_PINH1.2 92.77,60.58 91.12,60.58 88.96,62.74 D7.2 88.84,62.87 88.01,62.87 87.31,63.56 85.34,63.56 81.79,60.01 81.79,55.6 | R2-PINH1.2 87.76,45.91 85.34,48.32 82.04,48.32 81.22,49.15 81.22,49.59 U3.2 81.22,49.78 81.79,50.35 81.79,55.6 | R8.2 43.12,18.1 46.04,18.1 R7.2 46.16,18.1 48.2,18.1 R6.2 48.39,18.1 66.36,18.1 72.14,23.88 R_CL1.1 72.33,23.94 72.58,23.94 73.79,25.15 R9.2 73.91,25.08 74.3,24.7 77.66,24.7 | 77.66,24.7 78.23,24.7 Q2.3 | R2-PINH1.2 87.69,45.78 76.52,34.61 72.96,34.61 TP16.TP 72.83,34.54 72.83,30.23 76.96,26.1 76.96,25.4 77.66,24.7
  Top 0.3: 47.2,59.24 48.45,60.5 48.45,98.1 49.08,98.73 49.08,99.62
  Bottom 0.3: v10.86,99.69 19.56,99.69 v27.05,107.19 | v127.7,43.94 v124.4,40.64
32KHZ  (via drill 0.3)
  Top 0.15: R2-PINH1.1 86.49,45.91 83.31,45.91 79.95,49.28 79.95,49.59 U3.1 79.88,49.28 v75.37,44.77 | v44.64,44.77 42.35,42.48 18.86,42.48 18.16,43.18 18.16,46.23 U2.9
  Bottom 0.15: v75.37,44.77 v44.64,44.77
DN
  Top 0.15: 163.19,53.78 163.45,53.53 163.96,53.53 J2.B7 | 163.19,53.78 163.19,54.23 163.45,54.48 163.96,54.48 J2.A7 | 163.19,53.78 158.88,53.78 155.45,50.35 155.45,48.58 155.96,48.07 156.21,48.07 D1.4
DP  (via drill 0.3)
  Top 0.15: J2.A6 164.02,54.04 164.59,54.04 164.78,54.23 164.78,54.8 164.59,54.99 164.02,54.99 J2.B6 163.96,54.99 v162.37,54.99 | v157.35,49.97 156.27,49.97 D1.6
  Bottom 0.15: v162.37,54.99 v157.35,49.97
EPD_3V3  (via drill 0.3)
  Top 0.3: Q2.2 76.2,23.75 79.57,23.75 C7.1 | C7.1 79.63,23.94 79.63,24.64 81.03,26.04 L1.2 | J1.16 83.31,15.24 83.76,15.24 J1.15 83.82,15.37 83.82,16.13 v85.47,17.78 | TP17.TP 96.9,27.05 96.9,24.45 91.25,18.8 EPD_C5.1 91.12,18.61 90.74,18.22 v90.74,18.03 | v79.57,22.67 79.57,23.62 C7.1
  Bottom 0.3: v90.74,18.03 90.49,17.78 v85.47,17.78 85.34,17.84 84.52,17.84 79.69,22.67 v79.57,22.67
EPD_3V3_C  (via drill 0.3)
  Top 0.3: Q2.1 76.14,25.65 75.95,25.84 73.28,25.84 72.64,25.21 72.33,25.21 R_CL1.2 72.14,25.21 64.58,25.21 51.82,37.97 TP13.TP 51.69,38.04 51.37,38.35 v50.29,38.35 | v36.01,48.07 20.7,63.37 20.7,63.75 U2.18
  Bottom 0.3: v36.01,48.07 40.58,48.07 v50.29,38.35
EPD_BUSY  (via drill 0.3)
  Top 0.15: v86.42,14.35 86.74,14.67 86.74,15.18 J1.9 | v82.61,10.54 71.75,10.54 64.64,3.43 30.86,3.43 13.02,21.27 TP9.TP 12.95,21.34 7.24,27.05 7.24,47.56 10.48,50.8 10.48,63.75 U2.26
  Bottom 0.15: v82.61,10.54 v86.42,14.35
EPD_CS  (via drill 0.3)
  Top 0.15: v84.84,16 85.28,15.56 85.28,15.24 J1.12 | v77.28,20.83 76.58,21.53 D6.1 76.52,21.59 74.3,23.81 73.85,23.81 R9.1 | v43.05,43.81 22.86,43.81 20.7,45.97 20.7,46.23 U2.11 | v72.64,7.18 72.64,5.84 TP10.TP
  Bottom 0.15: v43.05,43.81 66.04,20.83 v77.28,20.83 82.11,16 v84.84,16 84.77,16.07 84.77,16.64 85.03,16.89 85.41,16.89 85.66,16.64 85.66,14.41 84.45,13.21 78.68,13.21 v72.64,7.18
EPD_DC  (via drill 0.3)
  Top 0.15: v86.93,18.29 85.85,17.21 85.85,15.24 J1.11 | v64.33,23.18 37.72,23.18 36.45,21.91 25.84,21.91 18.8,28.96 TP11.TP 18.73,29.02 v13.02,34.73 | v13.02,42.29 13.02,46.23 U2.5
  Bottom 0.15: v86.93,18.29 84.58,18.29 79.69,23.18 v64.33,23.18 | v13.02,34.73 v13.02,42.29
EPD_RST  (via drill 0.3)
  Top 0.15: v85.03,14.41 85.85,14.41 86.23,14.8 86.23,15.18 J1.10 | v44.39,13.53 44.07,13.53 42.29,15.3 36.89,15.3 TP12.TP | v9.78,48.01 11.75,48.01 16.83,53.09 16.83,63.75 U2.21
  Bottom 0.15: v85.03,14.41 84.14,13.53 v44.39,13.53 44.39,13.08 43.05,11.75 42.67,11.75 42.42,12 42.42,13.53 13.21,42.74 12,42.74 9.78,44.96 v9.78,48.01
FLASH_CS
  Top 0.15: 43.56,46.1 44.2,46.1 44.26,46.04 D9.1 | 43.56,46.1 42.67,46.1 R5.1 42.61,46.1 41.47,44.96 22.99,44.96 21.97,45.97 21.97,46.23 U2.12 | 43.56,46.1 43.56,48.07 43.69,48.2 43.69,57.02 42.35,58.36 42.35,58.61 U1.1
GDR  (via drill 0.3)
  Top 0.15: v90.23,14.41 90.23,15.18 J1.2 | v86.68,12.06 74.17,12.06 71.18,15.05 R4.1 71.12,15.18 69.53,16.76 68.33,16.76 67.63,16.07 67.44,16.07 Q3.1
  Bottom 0.15: v90.23,14.41 89.03,14.41 v86.68,12.06
GND  (via drill 0.3)
  Top 0.15: 153.61,4.13 154.11,4.13 C1.2 | 153.61,4.13 153.1,4.13 C2.2 | 154.07,10.27 153.73,10.6 153.54,10.6 SENSOR2.7 | 154.07,10.27 154.24,10.1 154.24,9.53 153.73,9.02 153.54,9.02 SENSOR2.5 153.61,8.95 153.61,4.13 | J2.B12 164.02,51.18 164.02,50.93 J2.A1 164.02,50.86 164.02,49.72 164.53,49.21 J2.MP3 | J2.MP3 164.59,49.15 168.47,49.15 J2.MP1 168.53,49.21 168.53,59.31 J2.MP2 168.47,59.37 164.59,59.37 J2.MP4 164.53,59.31 164.02,58.8 164.02,57.66 J2.A12 164.02,57.59 164.02,57.34 J2.B1 163.96,57.28 158.56,57.28 151.7,50.42 151.7,49.85 R2-USB.2 151.64,49.72 151.64,49.53 151,48.9 151,48.07 151.19,47.88 152.4,47.88 153.48,48.96 153.73,48.96 D1.2 153.8,48.96 154.05,48.96 155.13,47.88 155.13,44.39 C4_USB.2 155.13,44.32 154.81,44.01 143.51,44.01 | 159,37.53 159,49.66 158.78,49.88 | 158.78,49.88 158.18,50.48 R2-USB1.1 | C5_USB.2 155.26,42.74 155.26,39.69 157.16,37.78 158.81,37.78 158.81,37.72 159,37.53 | J2.MP3 163.96,49.72 159.4,49.72 159.24,49.88 158.78,49.88 | 159,37.53 166.18,30.35 166.18,18.41 165.61,17.84 165.29,17.84 J3.1 162.81,17.78 156.46,11.43 SENSOR2.1 156.34,11.37 155.57,11.37 154.48,10.27 154.07,10.27 | 143.51,44.01 136.46,44.01 C1_BAT.2 | U4.4 139.64,55.5 139.95,55.5 140.65,56.2 U4.9 | U4.9 140.65,56.26 139.95,56.96 139.64,56.96 U4.1 139.57,56.96 139.45,56.83 136.08,56.83 C1_BAT1.2 136.02,56.77 129.22,56.77 128.91,56.45 | U4.9 140.72,56.2 140.91,56.01 141.54,56.01 U4.6 141.6,55.94 141.92,55.94 142.18,55.69 142.18,50.8 144.21,48.77 144.21,44.7 143.51,44.01 | IC4.2 125.73,43.31 125.92,43.31 126.36,42.86 126.36,42.04 126.17,41.85 122.43,41.85 122.3,41.72 121.16,41.72 121.03,41.85 121.03,42.8 122.05,43.81 122.3,43.81 126.3,47.82 126.3,49.34 126.94,49.97 C2_BAT.2 127,50.04 130.56,53.59 130.56,54.48 129.98,55.05 129.73,55.05 MCP73831.2 129.67,55.12 129.41,55.12 128.91,55.63 128.91,56.45
  Top 0.15: 97.47,52.77 97.35,52.9 95.82,52.9 94.04,51.12 93.22,51.12 C8.2 93.15,51.12 91.25,51.12 83.76,58.61 83.76,58.93 U3.13 | 97.47,52.77 97.47,50.67 96.58,49.78 C10_SUPERCAP.1 | 121.86,40.96 124.08,40.96 124.21,41.08 132.33,41.08 132.59,41.34 C3.- | 121.86,40.96 120.9,40.96 119.44,42.42 119.44,42.55 R1_PWRUSB.1 119.38,42.61 115.95,46.04 115.95,53.4 115.95,56.01 R2_BAT.1 116.01,56.01 117.47,57.47 126.87,57.47 127.89,56.45 128.91,56.45 | v121.35,39.81 121.35,38.92 C1_BAT2.2 121.28,38.86 100.71,38.86 94.17,32.33 94.17,31.92 93.85,31.6 | v121.86,40.83 121.86,40.96 | 115.3,52.77 97.47,52.77 | C_DELAY.2 52.45,98.3 59.5,98.3 68.14,106.93 68.14,107.76 67.82,108.08 65.72,108.08 RESET_BUTTON.2 65.66,108.14 62.23,108.14 RESET_BUTTON.1 62.17,108.08 62.04,108.08 61.47,107.5 60.45,107.5 C5.2 60.39,107.5 59.63,108.27 52.13,108.27 52.07,108.2 50.74,108.2 CHANGE_BUTTON.2 50.67,108.14 47.24,108.14 CHANGE_BUTTON.1 47.18,108.08 46.29,107.19 C10.2 45.4,107.19 38.73,107.19 38.04,107.89 27.05,107.89 26.38,107.22 | 26.38,107.22 25.78,107.82 25.78,108.08 BOOT_BUTTON.2 25.72,108.14 BOOT_BUTTON.1 22.23,108.08 21.97,108.08 v21.27,107.38 | 26.38,107.22 35.62,97.98 47.62,97.98 IC1.3 | J4.G1 15.43,85.66 15.43,86.68 14.61,87.5 14.61,90.55 15.37,91.31 J4.G2 15.43,91.38 15.43,92.39 16.26,93.22 16.26,98.04 D8.2 14.16,100.14 | 14.16,100.14 9.91,100.14 C9.2 9.84,100.2 9.27,100.78 7.37,100.78 2.22,95.63 J4.G4 2.16,95.63 2.16,95.38 4.64,92.9 4.76,92.9 J4.P6 4.64,92.84 1.27,89.47 1.27,82.55 J4.G3 1.27,82.49 1.27,76.39 7.94,69.72 7.94,63.82 U2.28 8,63.75 v8,59.69
  Top 0.15: 19.53,107.73 14.16,102.36 14.16,100.14 | 19.53,107.73 20.38,108.58 20.38,108.78 C6.2 | v19.56,107.7 19.53,107.73 | U2.29_9 14.86,54.8 13.72,54.8 U2.29_6 13.65,54.74 13.65,53.59 U2.29_5 | U2.29_1 12.45,52.32 12.45,53.53 U2.29_2 | U2.29_1 12.51,52.32 13.65,52.32 U2.29_4 13.72,52.32 14.86,52.32 U2.29_7 | U2.29_5 12.51,53.53 U2.29_2 | U2.29_8 14.86,53.53 13.72,53.53 U2.29_5 | U2.29_2 12.45,53.59 12.45,54.74 U2.29_3 12.38,54.8 10.92,56.26 v10.92,56.77 | U2.29_1 12.38,52.26 8,47.88 8,46.29 U2.1 8,46.23 8,45.97 18.16,35.81 36.32,35.81 36.75,36.25 45.09,44.58 45.09,46.74 44.32,47.5 D9.2 44.26,47.56 44.26,54.8 v44.13,54.86 44.39,54.86 46.23,56.71 U1.9 | v43.24,54.86 42.35,54.86 U1.4 | 36.32,35.3 36.32,23.5 TP5.TP 36.26,23.43 36.26,23.11 v35.5,22.35 | 89.7,15.81 87.57,15.81 87.31,15.56 87.31,15.24 J1.8 87.25,15.18 87.25,14.54 86.61,13.91 83.69,13.91 82.8,14.8 82.8,15.18 J1.17 82.74,14.8 82.49,14.54 79.06,14.54 76.39,17.21 76.39,19.3 76.74,19.66 | 89.7,15.81 91.06,15.81 91.76,15.11 91.76,12.7 J1.MP1 | EPD_C10.2 83,20.13 84.52,20.13 EPD_C9.2 84.58,20.13 86.11,20.13 EPD_C8.2 86.17,20.13 87.88,20.13 EPD_C7.2 87.95,20.13 89.6,20.13 EPD_C6.2 89.66,20.07 90.6,20.07 | 90.6,20.07 91.19,20.07 EPD_C5.2 91.19,20.13 93.85,22.8 93.85,31.6 | 93.85,31.6 93.85,32.07 92.33,33.59 82.8,33.59 D3.1 | D10.2 48.2,22.16 46.04,22.16 D11.2 45.97,22.16 43.12,22.16 D12.2 43.05,22.1 40.78,19.82 40.45,19.49 TP4.TP 36.96,19.56 v36.96,20.89 | EPD_C11.2 81.28,20.13 79.82,20.13 EPD_C12.2 79.76,20.19 79.76,20.89 79.12,21.53 79.12,21.59 78.9,21.59 | 78.9,21.59 78.11,21.59 D6.2 78.04,21.53 78.04,20.95 76.74,19.66
  Top 0.15: C7.2 80.83,23.75 80.83,23.3 79.67,22.13 79.44,22.13 78.9,21.59 | SJ1.1 66.61,9.84 66.74,9.97 66.74,11.49 R2.1 66.8,11.56 66.8,15 | J1.MP2 78.23,12.7 74.8,12.7 72.45,15.05 R4.2 72.39,15.11 71.15,16.35 70.42,17.08 67.37,17.08 66.8,16.51 66.8,15 | 71.17,17.13 73.28,19.24 73.53,19.24 EPD_C1.2 EPD_C2.2 75.06,19.3 75.8,19.3 76.15,19.66 76.74,19.66 | 40.45,19.1 40.45,17.78 44.26,13.97 65.7,13.97 66.73,15 66.8,15 | 89.7,15.81 90.3,16.41 90.3,19.76 90.6,20.07
  Top 0.152: 36.75,36.25 36.75,35.73 36.32,35.3 | 40.78,19.82 40.78,19.43 40.45,19.1 | 71.17,17.13 71.17,16.37 71.15,16.35 | 115.3,52.77 115.93,53.4 115.95,53.4
  Bottom 0.15: v121.35,39.81 121.35,40.32 v121.86,40.83 | v21.27,107.38 19.88,107.38 v19.56,107.7 | v44.13,54.86 v43.24,54.86 | v36.96,20.89 v35.5,22.35 | v10.92,56.77 v8,59.69
  pour Top: 6.56,45.96 6.54,45.94 6.52,45.92 0.08,45.92 0.08,0.08 75.92,0.08 75.92,10.02 75.94,10.04 75.96,10.06 75.98,10.08 94.22,10.08 94.24,10.06 94.26,10.04 94.28,10.02 94.28,0.08 170.12,0.08 170.12,67.12 92.18,67.12 92.16,67.14 92.14,67.16 92.12,67.18 92.12,111.12 73.18,111.12 73.18,110.38 73.16,110.36 73.14,110.34 73.12,110.32 17.88,110.32 17.86,110.34 17.84,110.36 17.82,110.38 17.82,111.12 0.08,111.12 0.08,64.18 6.52,64.18 6.54,64.16 6.56,64.14 6.58,64.12 6.58,45.98
  pour Bottom: 6.56,45.96 6.54,45.94 6.52,45.92 0.08,45.92 0.08,0.08 75.92,0.08 75.92,10.02 75.94,10.04 75.96,10.06 75.98,10.08 94.22,10.08 94.24,10.06 94.26,10.04 94.28,10.02 94.28,0.08 170.12,0.08 170.12,67.12 92.18,67.12 92.16,67.14 92.14,67.16 92.12,67.18 92.12,111.12 73.18,111.12 73.18,110.38 73.16,110.36 73.14,110.34 73.12,110.32 17.88,110.32 17.86,110.34 17.84,110.36 17.82,110.38 17.82,111.12 0.08,111.12 0.08,64.18 6.52,64.18 6.54,64.16 6.56,64.14 6.58,64.12 6.58,45.98
  pour Top: 80.26,64.76 80.24,64.74 80.22,64.72 78.38,64.72 78.38,58.48 92.92,58.48 92.92,64.82 80.27,64.82 80.28,64.82 80.28,64.78
  pour Top: 77.76,58.06 77.74,58.04 77.72,58.02 77.48,58.02 77.48,46.38 87.22,46.38 87.22,58.92 77.78,58.92 77.78,58.08
  pour Top: 11.26,67.96 11.24,67.94 11.22,67.92 8.88,67.92 8.88,29.68 44.82,29.68 44.82,68.02 11.28,68.02 11.28,67.98
  pour Top: 16.76,49.86 16.78,49.88 20.32,49.88 20.32,57.92 10.36,57.92 10.08,56.79 10.08,56.78 10.07,56.78 10.07,56.77 10.07,56.76 10.06,56.76 10.06,56.75 10.05,56.74 10.05,56.74 10.04,56.74 10.03,56.73 10.03,56.73 10.02,56.73 10.02,56.72 10.01,56.72 10,56.72 9.99,56.72 8.58,56.72 8.58,49.68 16.72,49.68 16.72,49.82 16.74,49.84
  pour Top: 34.38,16.58 71.42,16.58 71.42,64.02 35.67,64.02 34.38,17.2
  pour Top: 36.68,6.28 45.42,6.28 45.42,13.42 36.97,13.42
  pour Top: 81.78,15.98 86.02,15.98 86.02,22.32 81.78,22.03
  pour Top: 80.68,18.68 84.02,18.68 84.02,21.42 80.68,21.33
  pour Top: 78.98,17.18 84.02,17.18 84.02,21.42 78.98,21.42
  pour Bottom: 5.27,9.18 26.22,9.18 26.22,35.82 4.78,35.82
  pour Bottom: 82.38,45.78 99.62,45.78 99.62,65.32 98.11,65.32 98.11,65.32 98.1,65.32 98.08,65.32 98.08,65.32 82.38,65.42
  pour Bottom: 25.98,44.58 41.32,44.58 41.32,56.52 41.01,56.52 41.01,56.52 41,56.52 40.98,56.52 40.98,56.52 25.98,57.12
  pour Bottom: 39.7,30.72 69.52,4.17 69.52,30.72
  pour Bottom: 95.48,7.98 97.82,7.98 97.82,28.92 68.66,28.92 95.44,11.87 95.44,11.86 95.45,11.86 95.45,11.86 95.46,11.85 95.46,11.84 95.47,11.84 95.47,11.83 95.47,11.82 95.48,11.82 95.48,11.81 95.48,11.8 95.48,11.79
  pour Bottom: 69.94,22.52 79.72,17.92 79.72,22.52
  pour Bottom: 32.86,63.12 78.92,55.79 78.92,63.12
  pour Bottom: 79.16,55.62 115.32,12.91 115.32,55.62
  pour Bottom: 147.58,45.62 147.58,39.58 150.09,45.62
  pour Bottom: 85.28,62.52 85.28,54.92 91.34,62.52
  pour Bottom: 40.98,23.72 40.98,5.54 53.85,23.72
  pour Top: 122.08,60.12 148.22,32.99 148.22,60.12
  pour Top: 116.95,60.22 136.02,32.94 136.02,60.22
  pour Top: 143.48,7.22 143.48,5.88 162.44,7.22
  pour Top: 153.78,52.08 160.18,52.08 153.78,57.24
  pour Top: 129.98,52.08 159.97,52.08 129.98,62.99
  pour Top: 12.66,23.38 129.82,23.38 129.82,62.99
  pour Top: 12.28,14.38 78.75,14.38 12.28,23.21
  pour Top: 66.74,20.52 79.82,14.42 79.82,20.52
GPIO8
  Top 0.15: R1.2 19.43,43.12 19.43,46.23 U2.10
I2C_PW  (via drill 0.3)
  Top 0.15: R1_PINH.2 155.38,4.13 156.46,4.13 R2-PINH.2 | SENSOR2.2 156.34,10.6 156.15,10.6 155.64,10.1 155.64,4.19 R1_PINH.2 | R1_PINH.2 155.32,4.06 154.11,2.86 C1.1 154.11,2.79 153.1,2.79 C2.1 153.1,2.86 152.34,3.62 152.34,8.89 153.23,9.78 SENSOR2.6 153.48,9.84 153.23,9.84 152.73,10.33 152.72,10.35 | 152.72,10.35 152.72,10.92 153.16,11.37 153.48,11.37 SENSOR2.8 | v36.89,48.58 21.97,63.5 21.97,63.75 U2.17 | v139,10.92 151.9,10.92 152.15,10.92 152.72,10.35
  Bottom 0.15: v36.89,48.58 101.35,48.58 v139,10.92
INT_RTC  (via drill 0.3)
  Top 0.15: TP15.TP 101.6,60.96 99.89,59.24 92.84,59.24 R1_PINH1.1 92.77,59.18 v90.49,59.18 | v17.72,45.15 16.89,45.97 16.89,46.23 U2.8 | v82.3,51.05 82.3,49.78 82.42,49.66 U3.3
  Bottom 0.15: v17.72,45.15 32.45,45.15 38.35,51.05 v82.3,51.05 82.36,51.05 v90.49,59.18
IO/BOOT
  Top 0.15: R_BOOT.2 27.88,108.65 26.8,108.65 25.78,109.67 BOOT_BUTTON.3 25.72,109.67 22.29,109.67 BOOT_BUTTON.4 22.23,109.6 21.34,108.71 21.34,108.58 20.45,107.7 20.45,107.5 C6.1 20.45,107.44 24.45,103.44 24.45,63.82 U2.15
IO/CHANGE  (via drill 0.3)
  Top 0.15: R_CHANGE.2 52.64,109.03 51.31,109.03 50.74,109.6 CHANGE_BUTTON.3 50.67,109.67 47.24,109.67 CHANGE_BUTTON.4 47.18,109.67 46.04,108.52 45.47,108.52 C10.1 45.4,108.46 v44.77,107.82 | v14.35,68.52 14.35,63.82 U2.23
  Bottom 0.15: v14.35,68.52 14.35,77.41 v44.77,107.82
MISO  (via drill 0.3)
  Top 0.15: D12.1 43.05,20.57 42.1,19.62 42.1,17.46 42.8,16.76 43.05,16.76 R8.1 42.86,16.7 v42.86,16 | v42.86,12.19 42.86,9.59 40.32,7.05 40.32,4.7 TP6.TP | v41.97,57.98 42.29,57.66 42.29,57.4 U1.2 | v10.03,62.67 9.27,63.44 9.27,63.75 U2.27 9.14,63.82 9.14,64.14 v8.38,64.9 | v6.54,92.52 5.14,93.92 5.02,93.92 J4.P7 | v42.86,30.61 42.86,41.91 45.4,44.45 v45.4,54.23
  Bottom 0.15: v42.86,12.19 v42.86,16 v42.86,30.61 | v10.03,62.67 14.73,57.98 v41.97,57.98 41.97,57.91 45.4,54.48 v45.4,54.23 | v6.54,92.52 6.54,66.74 v8.38,64.9
MOSI  (via drill 0.3)
  Top 0.15: v85.22,16.45 84.64,16.45 84.33,16.13 84.33,15.24 J1.14 | v50.55,15.56 48.77,17.34 46.67,17.34 46.1,16.76 R7.1 46.04,16.83 45.53,17.34 42.67,17.34 42.42,17.59 42.42,18.54 44.45,20.57 45.97,20.57 D11.1 46.74,21.34 48.7,21.34 48.96,21.59 48.96,22.67 48.77,22.86 38.23,22.86 35.31,19.94 35.31,14.22 39.69,9.84 39.69,8.19 TP7.TP | v49.85,24 49.85,38.54 50.1,38.8 50.1,54.8 U1.5 | v17.72,43.88 15.62,45.97 15.62,46.23 U2.7 | v4.32,88.84 5.02,89.53 J4.P3
  Bottom 0.15: v85.22,16.45 85.22,16.26 85.28,16.19 85.28,15.81 85.03,15.56 v50.55,15.56 50.55,15.62 49.85,16.32 v49.85,24 49.85,24.7 30.67,43.88 v17.72,43.88 11.81,43.88 10.67,45.02 10.67,54.55 7.13,58.09 7.13,64.36 4.32,67.17 v4.32,88.84
N$1
  Top 0.15: R2-USB1.2 158.18,51.88 162.31,51.88 163.39,52.96 163.96,52.96 J2.A5
N$2
  Top 0.15: R2-USB.1 151.7,48.51 151.7,48.64 152.59,49.53 152.59,50.86 157.73,56.01 163.96,56.01 J2.B5
N$4
  Top 0.15: 124.5,42.35 125.03,42.35 125.6,42.35 125.67,42.42 IC4.3 | 124.5,42.35 121.79,42.35 D2.1 | 136.08,51.9 136.08,55.44 C1_BAT1.1 | Q1.2 138.49,48.9 137.1,50.29 137.03,50.29 136.08,51.24 135.7,51.24 134.37,51.24 127.51,44.39 125.73,44.39 IC4.1 125.67,44.26 125.54,44.26 125.03,43.75 125.03,43 125.03,42.89 124.5,42.35
  Top 0.152: 136.08,51.9 136.08,51.62 135.7,51.24
N$5
  Top 0.15: C4.1 93.09,31.62 92.08,31.62 91.38,30.92 D4.1 91.25,30.86 90.3,31.81 83.25,31.81 81.47,33.59 79.31,33.59 D3.2
N$6
  Top 0.15: C_DELAY.1 52.39,99.57 50.67,99.57 50.48,99.76 IC1.5
N$7
  Top 0.15: CHG_LED.C 121.92,56.01 121.92,55.56 123.51,53.98 R1_BAT.2
N$9
  Top 0.15: R1_BAT.1 122.24,53.91 122.43,53.91 123.19,53.15 128.71,53.15 129.67,54.1 MCP73831.1
N$10
  Top 0.15: J1.4 89.28,15.18 89.28,14.67 88.2,13.59 78.74,13.59 74.93,17.4 74.17,17.4 73.6,17.97 EPD_C1.1
N$11
  Top 0.15: R2_BAT.2 117.28,56.07 120.21,56.07 121.28,57.15 124.08,57.15 127.06,54.17 MCP73831.5
N$12  (via drill 0.3)
  Top 0.15: v88.01,14.03 88.77,14.8 88.77,15.18 J1.5 | v87.12,13.14 78.74,13.14 74.8,17.08 73.41,17.08 72.9,17.59 72.9,18.41 73.09,18.61 74.42,18.61 74.99,18.03 EPD_C2.1
  Bottom 0.15: v87.12,13.14 v88.01,14.03
N$13
  Top 0.15: R_CAPACITOR.1 86.81,61.21 86.81,62.74 D7.1
N$14
  Top 0.15: J1.20 81.34,15.24 81.34,16.32 82.36,17.34 84.39,17.34 85.85,18.8 86.11,18.8 EPD_C8.1
N$15  (via drill 0.3)
  Top 0.15: v82.55,16.89 81.85,16.19 81.85,15.24 J1.19 | v83.31,18.1 83.88,18.67 83.88,19.24 84.01,19.37 87.38,19.37 87.88,18.86 EPD_C7.1
  Bottom 0.15: v82.55,16.89 82.55,17.34 v83.31,18.1
N$16  (via drill 0.3)
  Top 0.15: v83.63,16.89 82.3,15.56 82.3,15.24 J1.18 | v88.08,17.27 EPD_C6.1
  Bottom 0.15: v83.63,16.89 84.58,16.89 84.96,17.27 v88.08,17.27
N$18
  Top 0.15: J1.22 80.33,15.24 80.33,16.19 82.93,18.8 EPD_C10.1
N$20
  Top 0.15: J1.24 79.31,15.24 79.31,18.35 79.76,18.8 EPD_C12.1
PREVGH
  Top 0.15: J1.21 80.83,15.24 80.83,16.26 82.23,17.65 83.5,17.65 84.52,18.67 84.52,18.8 EPD_C9.1
PREVGL
  Top 0.15: D4.2 87.82,30.86 87.82,26.8 D5.1 87.82,26.73 87.82,26.1 81.98,20.26 81.98,19.49 81.34,18.86 EPD_C11.1 81.28,18.8 79.82,17.34 79.82,15.24 J1.23
RESE
  Top 0.15: J1.3 89.79,15.18 89.79,14.54 86.42,11.18 69.98,11.18 R3.1 69.98,11.24 68.71,12.51 68.71,16 Q3.2
RESE'
  Top 0.15: R3.2 69.91,9.84 68.14,9.84 SJ1.2 68.14,9.91 68.14,11.49 R2.2
RESET  (via drill 0.3)
  Top 0.15: R_RESET.2 67.37,108.65 66.74,108.65 65.72,109.67 RESET_BUTTON.3 65.66,109.67 62.23,109.67 RESET_BUTTON.4 62.17,109.6 61.28,109.6 60.45,108.78 C5.1 60.39,108.71 v57.4,108.71 | v48.51,99.82 47.69,99.82 IC1.1 | v11.11,45.21 10.54,45.78 10.54,46.23 U2.3
  Bottom 0.15: v57.4,108.71 v48.51,99.82 46.55,99.82 9.59,62.87 9.59,62.48 11.37,60.71 11.37,56.58 11.11,56.33 v11.11,45.21
RTC_RST  (via drill 0.3)
  Top 0.15: v42.1,50.61 36.13,50.61 23.24,63.5 23.24,63.75 U2.16 | v83.06,50.86 83.06,50.29 83.69,49.66 U3.4
  Bottom 0.15: v42.1,50.61 82.8,50.61 v83.06,50.86
RX
  Top 0.15: U2.24 13.08,63.82 13.08,67.88 15.18,69.98 TP2.TP
SCK  (via drill 0.3)
  Top 0.15: v84.39,14.41 84.77,14.8 84.77,15.18 J1.13 | v50.55,14.41 48.26,16.7 R6.1 | 49.4,55.12 50.1,55.82 50.1,56.07 U1.6 | v49.4,23.62 49.4,55.12 | v49.34,20.64 48.26,20.64 D10.1 | v18.03,42.29 14.35,45.97 14.35,46.23 U2.6 | v21.53,65.41 3.81,83.12 3.81,91.06 4.45,91.69 5.02,91.69 J4.P5 | v49.28,55.18 49.34,55.12 49.4,55.12 | v43.5,13.46 41.85,11.81 39.5,11.81 TP8.TP
  Bottom 0.15: v84.39,14.41 v50.55,14.41 50.55,14.48 49.4,15.62 | 49.4,15.62 49.4,20.64 | 49.4,20.64 v49.4,23.62 49.4,24.7 31.81,42.29 v18.03,42.29 | v49.34,20.64 49.4,20.64 | v21.53,65.41 21.53,59.5 22.61,58.42 46.04,58.42 v49.28,55.18 | v43.5,13.46 43.69,13.46 45.85,15.62 49.4,15.62
SCL  (via drill 0.3)
  Top 0.15: v21.97,59.69 18.16,63.5 18.16,63.75 U2.20 | U3.16 79.88,58.99 v79.18,59.69 79.18,60.07 83.06,63.94 135.45,63.94 144.46,54.93 144.46,50.04 144.26,49.84 144.26,49.16 | R2-PINH.1 156.53,2.86 156.53,3.05 157.16,3.68 157.16,8.26 v157.04,8.38 SENSOR2.4 | v145.41,48.01 144.26,49.16 | 144.26,49.16 143.92,49.5 143.57,49.85 143.57,54.8 141.92,56.45 141.6,56.45 U4.7 | v163.77,29.65 163.77,22.29 165.23,20.83 J3.4
  Bottom 0.15: v79.18,59.69 v21.97,59.69 | v145.41,48.01 v163.77,29.65 163.77,29.59 157.04,22.86 v157.04,8.38
SDA  (via drill 0.3)
  Top 0.15: v22.54,60.39 19.43,63.5 19.43,63.75 U2.19 | v80.14,60.39 81.15,59.37 81.15,58.99 U3.15 | R1_PINH.1 155.38,2.79 155.96,2.22 157.04,2.22 157.48,2.67 157.48,8.95 156.66,9.78 156.4,9.78 SENSOR2.3 156.66,9.84 v164.15,17.34 | v144.02,50.23 144.02,54.86 141.92,56.96 141.6,56.96 U4.8 | v163.32,30.92 163.32,21.4 164.91,19.81 165.23,19.81 J3.3
  Bottom 0.15: v22.54,60.39 v80.14,60.39 133.67,60.39 143.83,50.23 v144.02,50.23 v163.32,30.92 163.32,30.86 164.21,29.97 164.21,29.46 164.15,29.4 v164.15,17.34
SRC  (via drill 0.3)
  Top 0.15: D5.2 91.38,26.8 93.09,28.51 93.09,30.29 C4.2 93.03,30.23 89.79,30.23 88.52,31.5 87.12,31.5 84.26,28.64 | v71.44,21.53 68.07,18.16 Q3.3 | v80.01,21.53 83.95,25.46 83.95,27.75 83.66,28.04 83.05,28.65 81.09,30.61 L1.1
  Top 0.152: 84.26,28.64 83.06,28.64 83.05,28.65
  Bottom 0.15: v80.01,21.53 v71.44,21.53
SS_SD  (via drill 0.3)
  Top 0.15: v9.02,98.81 8,98.81 R10.1 | D8.1 14.22,98.61 14.03,98.81 v13.34,98.81 13.34,96.46 5.46,88.58 5.46,88.46 J4.P2 | v10.22,45.15 10.6,44.77 11.3,44.77 11.75,45.21 11.75,46.23 U2.4
  Bottom 0.15: v13.34,98.81 v9.02,98.81 9.02,98.74 3.87,93.6 3.87,67.22 6.85,64.25 6.85,57.92 10.22,54.55 v10.22,45.15
TX
  Top 0.15: U2.25 11.75,63.82 11.75,67.5 9.02,70.23 TP1.TP
USB_D+  (via drill 0.3)
  Top 0.15: v153.03,50.67 153.73,49.97 D1.1 | v92.52,58.48 v136.21,58.48 | v25.27,47.05 24.51,46.29 U2.14
  Bottom 0.15: v153.03,50.67 144.02,50.67 v136.21,58.48 | v92.52,58.48 92.33,58.48 90.87,59.94 80.07,59.94 71.82,51.69 29.91,51.69 v25.27,47.05
USB_D-  (via drill 0.3)
  Top 0.15: v144.65,47.56 152.53,47.56 152.97,48.01 153.73,48.01 D1.3 | v25.27,45.59 24.96,45.28 23.94,45.28 23.24,45.97 23.24,46.23 U2.13
  Bottom 0.15: v144.65,47.56 102.81,47.56 90.74,59.63 80.2,59.63 71.94,51.37 31.05,51.37 v25.27,45.59
VBAT
  Top 0.3: 130.94,54.2 130.94,55.18 130.11,56.01 129.73,56.01 MCP73831.3 | 130.94,54.2 130.94,52.77 127,48.83 127,48.7 C2_BAT.1 | U4.2 139.64,56.45 139.64,56.01 U4.3 139.51,55.94 139.19,55.94 137.6,54.36 | 137.6,54.36 137.6,50.99 Q1.3 137.73,50.93 141.41,47.24 142.94,47.24 TP3.TP | 137.6,54.36 137.6,55.18 136.65,56.13 135.45,56.13 134.56,55.24 132.1,55.24 131.06,54.2 130.94,54.2
VBUS
  Top 0.3: 156.46,43.5 156.46,42.86 156.53,42.8 C5_USB.1 156.59,42.61 156.59,41.21 157.99,39.81 PFMF.050.1.2 | 156.46,43.5 156.46,44.32 C4_USB.1 156.53,44.45 157.16,45.09 157.16,48.45 156.66,48.96 156.27,48.96 D1.5 | Q1.1 136.59,48.83 135.7,47.94 135.7,44.8 135.7,44.17 134.9,43.37 | MCP73831.4 127.13,56.01 128.02,55.12 128.02,53.72 127.83,53.53 126.43,53.53 123.95,56.01 123.44,56.01 CHG_LED.A 123.25,56.07 123.06,56.07 122.36,56.77 121.41,56.77 117.67,53.02 117.67,50.8 TP14.TP 117.6,50.67 119.38,48.9 119.38,44.07 R1_PWRUSB.2 119.44,43.94 120,43.94 | 120,43.94 121.28,43.94 121.73,44.39 D2.2 | 134.9,43.37 134.11,43.37 133.79,43.05 127.89,43.05 126.3,41.47 122.56,41.47 122.43,41.34 121.03,41.34 120.65,41.72 120.65,43.29 120,43.94 | 134.9,43.37 135.57,43.37 135.7,43.43 136.4,42.74 C1_BAT.1 136.59,42.74 137.35,43.5 156.46,43.5
VRTC
  Top 0.3: C10_SUPERCAP.2 96.52,51.88 94.42,49.78 C8.1 93.09,49.85 91.12,49.85 82.55,58.42 82.55,58.86 U3.14 82.49,58.99 82.49,59.44 83.31,60.26 87.12,60.26 88.01,61.15 R_CAPACITOR.2
VUSB  (via drill 0.3)
  Top 0.3: J2.A9 164.02,56.77 164.02,56.52 J2.B4 164.15,56.45 164.72,56.45 165.16,56.01 165.16,52.51 164.72,52.07 164.15,52.07 J2.B9 164.02,52.01 164.02,51.75 J2.A4 163.89,51.69 163.32,51.69 v161.8,50.16 | v153.61,41.97 153.61,39.88 153.54,39.81 PFMF.050.1.1
  Bottom 0.3: v153.61,41.97 v161.8,50.16
(copper drawn outside any net)
  shapes: Top area x12